# Altium PCB NEW_PCB.pcbdoc (part 2 of 2)
Units mil, origin at the board's own origin, x right, y up, seen from the top; angles counter-clockwise.
Board outline 5031.34 x 4281.32 mil, 2 copper layers (Top Layer, Bottom Layer); 79 components, 50 nets, 361 pads, 74 vias.
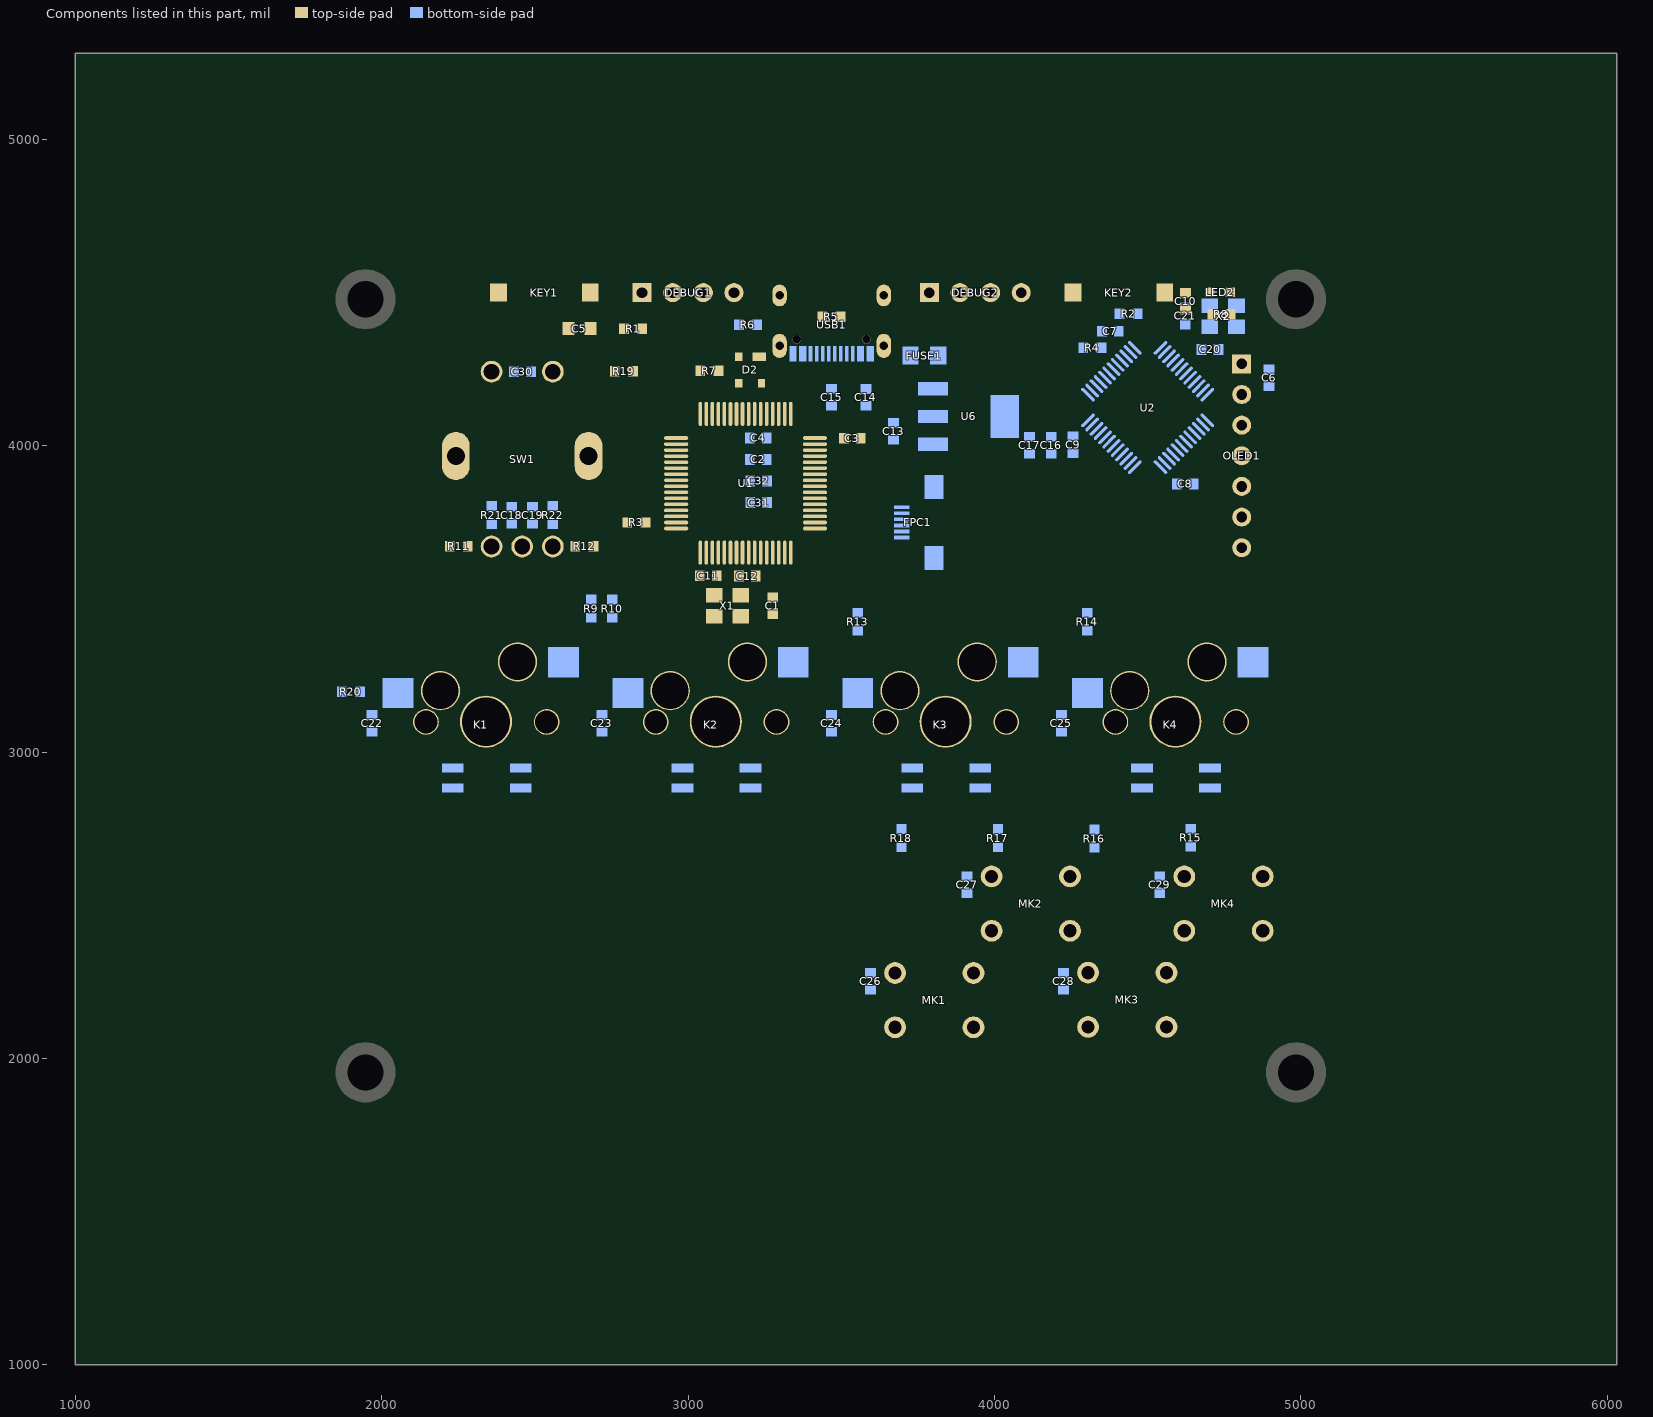
[diagram p2: the components of this part, seen from the top]

## Other copper
Top Layer:
  region net VCC: 4759.97,4207.78 4765.33,4201.8 4769.01,4196.34 4771.37,4191.23 4772.77,4186.28 4773.57,4181.3 4774.14,4176.1 4774.84,4170.49 4776.03,4164.29 4778.06,4157.31 4818.31,4156.52 4817.52,4196.76 4810.54,4198.8 4804.34,4199.99 4798.73,4200.69 4793.53,4201.26 4788.55,4202.06 4783.6,4203.46 4778.49,4205.82 4773.03,4209.5 4767.04,4214.86
  region net VCC: 3323.69,4004.9 3325.86,4006.95 3327.8,4008.55 3329.57,4009.77 3331.26,4010.7 3332.94,4011.43 3334.68,4012.04 3336.57,4012.63 3338.67,4013.28 3341.06,4014.06 3341.37,4029.64 3325.79,4029.34 3325,4026.95 3324.36,4024.85 3323.77,4022.96 3323.15,4021.22 3322.42,4019.54 3321.49,4017.85 3320.27,4016.08 3318.68,4014.14 3316.62,4011.97
  region net VCC: 3361.13,4030.38 3358.14,4030.46 3355.64,4030.7 3353.53,4031.1 3351.68,4031.63 3349.97,4032.3 3348.31,4033.1 3346.56,4034.02 3344.62,4035.05 3342.38,4036.19 3331.13,4025.41 3342.34,4014.59 3344.59,4015.72 3346.54,4016.75 3348.29,4017.66 3349.96,4018.46 3351.66,4019.13 3353.52,4019.66 3355.64,4020.06 3358.14,4020.3 3361.13,4020.38
  region net VCC: 3323.7,4004.89 3325.87,4006.94 3327.81,4008.54 3329.59,4009.76 3331.28,4010.69 3332.96,4011.42 3334.7,4012.04 3336.59,4012.63 3338.69,4013.28 3341.08,4014.07 3341.36,4029.65 3325.79,4029.32 3325,4026.93 3324.36,4024.83 3323.77,4022.95 3323.16,4021.2 3322.43,4019.52 3321.5,4017.84 3320.28,4016.06 3318.68,4014.13 3316.63,4011.96
  region net VCC: 3549.36,4055.27 3551.53,4057.33 3553.47,4058.93 3555.24,4060.14 3556.93,4061.08 3558.61,4061.81 3560.36,4062.42 3562.24,4063.01 3564.34,4063.66 3566.73,4064.44 3567.04,4080.02 3551.46,4079.72 3550.67,4077.33 3550.03,4075.23 3549.44,4073.34 3548.82,4071.6 3548.09,4069.92 3547.16,4068.23 3545.94,4066.45 3544.35,4064.52 3542.29,4062.34
  region net VCC: 2766.23,3589.28 2764.05,3587.23 2762.12,3585.63 2760.34,3584.41 2758.66,3583.48 2756.98,3582.75 2755.23,3582.14 2753.35,3581.55 2751.25,3580.91 2748.86,3580.12 2748.54,3564.54 2764.12,3564.84 2764.91,3567.23 2765.56,3569.33 2766.14,3571.21 2766.76,3572.96 2767.49,3574.64 2768.43,3576.33 2769.65,3578.1 2771.24,3580.04 2773.3,3582.21
  region net VCC: 3016.15,4377.78 3019.14,4377.7 3021.63,4377.46 3023.75,4377.06 3025.61,4376.53 3027.31,4375.86 3028.98,4375.06 3030.72,4374.14 3032.67,4373.11 3034.92,4371.98 3046.15,4382.78 3034.92,4393.58 3032.67,4392.45 3030.72,4391.42 3028.98,4390.5 3027.31,4389.7 3025.61,4389.03 3023.75,4388.49 3021.63,4388.1 3019.14,4387.86 3016.15,4387.78
  region net VCC: 3045.15,4358.78 3045.23,4361.77 3045.47,4364.27 3045.86,4366.38 3046.4,4368.24 3047.07,4369.94 3047.87,4371.61 3048.78,4373.36 3049.81,4375.3 3050.95,4377.55 3040.15,4388.78 3029.35,4377.55 3030.48,4375.3 3031.51,4373.36 3032.43,4371.61 3033.23,4369.94 3033.9,4368.24 3034.43,4366.38 3034.82,4364.27 3035.07,4361.77 3035.15,4358.78
  region net NRST1: 3163.25,3709.75 3163.33,3712.74 3163.57,3715.23 3163.96,3717.35 3164.5,3719.2 3165.17,3720.91 3165.97,3722.58 3166.89,3724.32 3167.92,3726.26 3169.05,3728.51 3158.26,3739.75 3147.45,3728.53 3148.58,3726.28 3149.61,3724.33 3150.53,3722.59 3151.33,3720.92 3152,3719.21 3152.53,3717.36 3152.92,3715.24 3153.16,3712.74 3153.25,3709.75
  region net NRST1: 2884.32,4066.24 2886.37,4064.07 2887.96,4062.14 2889.18,4060.36 2890.11,4058.68 2890.83,4057 2891.44,4055.25 2892.03,4053.37 2892.66,4051.27 2893.44,4048.88 2909.02,4048.52 2908.77,4064.1 2906.38,4064.9 2904.28,4065.55 2902.39,4066.14 2900.65,4066.76 2898.97,4067.5 2897.28,4068.43 2895.5,4069.66 2893.56,4071.25 2891.39,4073.31
  region net SPIN1: 2629.64,4247.39 2620.43,4247.9 2613.04,4249.37 2607.02,4251.66 2601.9,4254.62 2597.25,4258.09 2592.6,4261.93 2587.5,4265.98 2581.51,4270.1 2574.16,4274.13 2541.07,4242.17 2574.3,4210.35 2581.63,4214.42 2587.61,4218.56 2592.68,4222.64 2597.32,4226.5 2601.96,4230 2607.06,4232.99 2613.07,4235.31 2620.46,4236.83 2629.67,4237.39
  region net SWDIO1: 3074.52,4444.92 3074.92,4454.38 3075.96,4462.26 3077.38,4468.94 3078.95,4474.85 3080.41,4480.39 3081.53,4485.97 3082.03,4492.01 3081.69,4498.89 3080.26,4507.05 3040.33,4512.12 3036.82,4472.02 3041.84,4469.81 3046.54,4467.89 3050.86,4466.06 3054.72,4464.1 3058.05,4461.79 3060.77,4458.94 3062.8,4455.31 3064.07,4450.71 3064.52,4444.92
  region net EC11B: 3143.68,3926.79 3141.51,3924.73 3139.57,3923.14 3137.8,3921.91 3136.11,3920.98 3134.43,3920.25 3132.69,3919.64 3130.8,3919.05 3128.7,3918.41 3126.31,3917.61 3126,3902.04 3141.58,3902.34 3142.37,3904.73 3143.02,3906.84 3143.6,3908.72 3144.22,3910.46 3144.95,3912.14 3145.88,3913.83 3147.1,3915.61 3148.7,3917.54 3150.75,3919.72
  region net EC11A: 3143.23,3967.29 3141.06,3965.23 3139.12,3963.64 3137.35,3962.41 3135.66,3961.48 3133.98,3960.75 3132.24,3960.14 3130.35,3959.55 3128.25,3958.91 3125.86,3958.11 3125.55,3942.54 3141.13,3942.84 3141.92,3945.23 3142.57,3947.34 3143.15,3949.22 3143.77,3950.96 3144.5,3952.64 3145.43,3954.33 3146.65,3956.11 3148.25,3958.04 3150.3,3960.22
  region net +5V: 2323.41,3755.05 2320.42,3755.13 2317.92,3755.37 2315.8,3755.76 2313.95,3756.3 2312.25,3756.97 2310.58,3757.77 2308.83,3758.69 2306.89,3759.72 2304.64,3760.85 2293.41,3750.05 2304.64,3739.25 2306.89,3740.38 2308.83,3741.41 2310.57,3742.33 2312.24,3743.13 2313.95,3743.8 2315.8,3744.33 2317.92,3744.72 2320.42,3744.97 2323.41,3745.05
  region net +5V: 2285.97,3729.54 2288.14,3731.6 2290.08,3733.2 2291.85,3734.41 2293.54,3735.35 2295.22,3736.08 2296.97,3736.69 2298.85,3737.28 2300.95,3737.93 2303.34,3738.71 2303.65,3754.29 2288.07,3753.99 2287.28,3751.6 2286.64,3749.5 2286.05,3747.61 2285.43,3745.87 2284.7,3744.19 2283.77,3742.5 2282.55,3740.72 2280.96,3738.79 2278.9,3736.61
  region net USB_DN: 3170.39,4223.79 3170.47,4226.73 3170.72,4229.19 3171.12,4231.28 3171.67,4233.11 3172.36,4234.78 3173.19,4236.41 3174.14,4238.12 3175.22,4240 3176.41,4242.18 3166,4253.78 3154.82,4242.92 3155.9,4240.6 3156.88,4238.61 3157.75,4236.82 3158.52,4235.12 3159.17,4233.38 3159.69,4231.5 3160.07,4229.35 3160.31,4226.82 3160.39,4223.79
  region net USB_DP: 3123.45,4296.08 3120.47,4296.16 3117.98,4296.4 3115.87,4296.8 3114.02,4297.34 3112.32,4298.01 3110.66,4298.82 3108.92,4299.74 3106.99,4300.78 3104.76,4301.93 3093.45,4291.22 3104.6,4280.33 3106.86,4281.45 3108.81,4282.47 3110.57,4283.38 3112.25,4284.17 3113.96,4284.84 3115.82,4285.37 3117.94,4285.76 3120.45,4286 3123.45,4286.08
  region net USB_DP: 3104.45,4267.17 3104.53,4270.16 3104.77,4272.66 3105.16,4274.77 3105.7,4276.63 3106.37,4278.33 3107.17,4280 3108.08,4281.75 3109.11,4283.69 3110.25,4285.94 3099.45,4297.17 3088.65,4285.94 3089.78,4283.69 3090.81,4281.75 3091.73,4280 3092.53,4278.33 3093.2,4276.63 3093.73,4274.77 3094.12,4272.66 3094.36,4270.16 3094.45,4267.17
  region net VBUS: 3355.01,4229.68 3357.18,4231.73 3359.12,4233.32 3360.89,4234.55 3362.58,4235.48 3364.26,4236.21 3366.01,4236.82 3367.89,4237.41 3369.99,4238.06 3372.38,4238.84 3372.69,4254.42 3357.11,4254.12 3356.32,4251.73 3355.68,4249.63 3355.09,4247.74 3354.47,4246 3353.74,4244.32 3352.81,4242.63 3351.59,4240.85 3350,4238.92 3347.94,4236.75
  region net SW1_A: 2287.92,3666.34 2297.13,3665.81 2304.51,3664.31 2310.54,3662.01 2315.64,3659.03 2320.29,3655.55 2324.93,3651.69 2330.02,3647.63 2336.01,3643.5 2343.34,3639.45 2376.5,3671.34 2343.34,3703.23 2336.01,3699.18 2330.02,3695.05 2324.93,3690.99 2320.29,3687.14 2315.64,3683.65 2310.54,3680.68 2304.51,3678.37 2297.13,3676.87 2287.92,3676.34
  region net SW1_B: 2629.65,3676.34 2620.45,3676.87 2613.06,3678.37 2607.04,3680.68 2601.93,3683.65 2597.28,3687.14 2592.64,3690.99 2587.55,3695.05 2581.57,3699.18 2574.23,3703.23 2541.07,3671.34 2574.23,3639.45 2581.57,3643.5 2587.55,3647.63 2592.64,3651.69 2597.28,3655.55 2601.93,3659.03 2607.04,3662.01 2613.06,3664.31 2620.45,3665.81 2629.65,3666.34
  region net ADC3: 3375.8,4048.78 3378.79,4048.7 3381.28,4048.46 3383.4,4048.07 3385.26,4047.53 3386.96,4046.86 3388.63,4046.06 3390.38,4045.14 3392.32,4044.11 3394.57,4042.98 3405.8,4053.78 3394.57,4064.58 3392.32,4063.45 3390.38,4062.42 3388.63,4061.5 3386.96,4060.7 3385.26,4060.03 3383.4,4059.49 3381.28,4059.1 3378.79,4058.86 3375.8,4058.78
  region net ADC4: 3320.8,4138.78 3320.88,4141.77 3321.12,4144.27 3321.51,4146.38 3322.05,4148.24 3322.72,4149.94 3323.52,4151.61 3324.43,4153.36 3325.46,4155.3 3326.6,4157.55 3315.8,4168.78 3305,4157.55 3306.13,4155.3 3307.16,4153.36 3308.08,4151.61 3308.88,4149.94 3309.55,4148.24 3310.08,4146.38 3310.47,4144.27 3310.72,4141.77 3310.8,4138.78
  region net U1RX: 4262.97,3892.98 4265.96,3892.9 4268.46,3892.66 4270.58,3892.26 4272.43,3891.73 4274.14,3891.06 4275.81,3890.26 4277.56,3889.35 4279.5,3888.32 4281.75,3887.19 4292.97,3898.01 4281.72,3908.79 4279.47,3907.66 4277.53,3906.62 4275.79,3905.7 4274.12,3904.9 4272.42,3904.23 4270.57,3903.7 4268.45,3903.3 4265.95,3903.06 4262.97,3902.98
  region net U1TX: 4190.8,3862.78 4193.79,3862.7 4196.28,3862.46 4198.4,3862.07 4200.26,3861.53 4201.96,3860.86 4203.63,3860.06 4205.38,3859.14 4207.32,3858.11 4209.57,3856.98 4220.8,3867.78 4209.57,3878.58 4207.32,3877.45 4205.38,3876.42 4203.63,3875.5 4201.96,3874.7 4200.26,3874.03 4198.4,3873.49 4196.28,3873.1 4193.79,3872.86 4190.8,3872.78
  region net MK_4: 4690.66,2599.38 4681.46,2599.91 4674.07,2601.4 4668.05,2603.71 4662.94,2606.68 4658.29,2610.17 4653.65,2614.02 4648.57,2618.09 4642.58,2622.22 4635.24,2626.27 4602.08,2594.38 4635.24,2562.49 4642.58,2566.53 4648.56,2570.66 4653.65,2574.73 4658.29,2578.58 4662.94,2582.07 4668.05,2585.04 4674.07,2587.35 4681.46,2588.84 4690.66,2589.38
  region net MK_4: 4565.68,2640.47 4571.86,2633.55 4576.06,2627.23 4578.73,2621.32 4580.28,2615.58 4581.16,2609.81 4581.8,2603.8 4582.62,2597.32 4584.06,2590.16 4586.55,2582.12 4632.56,2582.09 4630.79,2628.07 4622.74,2630.23 4615.59,2631.41 4609.12,2632.03 4603.13,2632.52 4597.4,2633.28 4591.7,2634.74 4585.84,2637.32 4579.6,2641.45 4572.75,2647.55
  region net MK_4: 4804.93,2589.38 4814.14,2588.84 4821.52,2587.35 4827.55,2585.04 4832.65,2582.07 4837.3,2578.58 4841.94,2574.73 4847.03,2570.66 4853.02,2566.53 4860.36,2562.49 4893.51,2594.38 4860.35,2626.27 4853.01,2622.22 4847.03,2618.09 4841.94,2614.02 4837.3,2610.17 4832.65,2606.68 4827.55,2603.71 4821.52,2601.4 4814.14,2599.91 4804.93,2599.38
  region net MK_3: 4376.66,2285.38 4367.46,2285.91 4360.07,2287.4 4354.05,2289.71 4348.94,2292.68 4344.29,2296.17 4339.65,2300.02 4334.57,2304.09 4328.58,2308.22 4321.24,2312.27 4288.08,2280.38 4321.24,2248.49 4328.58,2252.53 4334.56,2256.66 4339.65,2260.73 4344.29,2264.58 4348.94,2268.07 4354.05,2271.04 4360.07,2273.35 4367.46,2274.84 4376.66,2275.38
  region net MK_3: 4490.93,2275.38 4500.14,2274.84 4507.52,2273.35 4513.55,2271.04 4518.65,2268.07 4523.3,2264.58 4527.94,2260.73 4533.03,2256.66 4539.02,2252.53 4546.36,2248.49 4579.51,2280.38 4546.35,2312.27 4539.01,2308.22 4533.03,2304.09 4527.94,2300.02 4523.3,2296.17 4518.65,2292.68 4513.55,2289.71 4507.52,2287.4 4500.14,2285.91 4490.93,2285.38
  region net MK_3: 4553.05,2348.7 4555.54,2340.61 4555.87,2333.91 4554.43,2328.23 4551.59,2323.22 4547.75,2318.52 4543.28,2313.79 4538.56,2308.65 4533.97,2302.77 4529.89,2295.78 4561.82,2262.66 4593.66,2295.87 4589.7,2303.61 4586.09,2309.95 4582.73,2315.35 4579.52,2320.24 4576.36,2325.06 4573.15,2330.26 4569.81,2336.28 4566.22,2343.55 4562.29,2352.53
  region net MK_1: 3746.66,2284.38 3737.46,2284.91 3730.07,2286.4 3724.05,2288.71 3718.94,2291.68 3714.29,2295.17 3709.65,2299.02 3704.57,2303.09 3698.58,2307.22 3691.24,2311.27 3658.08,2279.38 3691.24,2247.49 3698.58,2251.53 3704.56,2255.66 3709.65,2259.73 3714.29,2263.58 3718.94,2267.07 3724.05,2270.04 3730.07,2272.35 3737.46,2273.84 3746.66,2274.38
  region net MK_1: 3622.17,2325.97 3628.3,2319.09 3632.47,2312.81 3635.09,2306.92 3636.6,2301.21 3637.42,2295.46 3637.97,2289.45 3638.69,2282.98 3640,2275.83 3642.32,2267.78 3688.32,2266.84 3687.45,2312.84 3679.4,2315.18 3672.25,2316.49 3665.78,2317.22 3659.77,2317.78 3654.02,2318.6 3648.3,2320.11 3642.41,2322.74 3636.13,2326.91 3629.24,2333.04
  region net MK_1: 3860.93,2274.38 3870.14,2273.84 3877.53,2272.35 3883.55,2270.04 3888.66,2267.07 3893.3,2263.58 3897.94,2259.73 3903.03,2255.66 3909.02,2251.53 3916.36,2247.49 3949.51,2279.38 3916.35,2311.27 3909.01,2307.22 3903.03,2303.09 3897.94,2299.02 3893.3,2295.17 3888.65,2291.68 3883.55,2288.71 3877.52,2286.4 3870.14,2284.91 3860.93,2284.38
  region net MK_2: 4061.66,2599.38 4052.46,2599.91 4045.07,2601.4 4039.05,2603.71 4033.94,2606.68 4029.29,2610.17 4024.65,2614.02 4019.57,2618.09 4013.58,2622.22 4006.24,2626.27 3973.08,2594.38 4006.24,2562.49 4013.58,2566.53 4019.56,2570.66 4024.65,2574.73 4029.29,2578.58 4033.94,2582.07 4039.05,2585.04 4045.07,2587.35 4052.46,2588.84 4061.66,2589.38
  region net MK_2: 3919.93,2589.38 3929.14,2588.85 3936.52,2587.35 3942.55,2585.05 3947.65,2582.07 3952.3,2578.59 3956.94,2574.73 3962.03,2570.67 3968.01,2566.54 3975.35,2562.49 4008.51,2594.38 3975.35,2626.27 3968.01,2622.22 3962.03,2618.09 3956.94,2614.03 3952.3,2610.18 3947.65,2606.69 3942.55,2603.72 3936.52,2601.41 3929.14,2599.91 3919.93,2599.38
  region net MK_2: 4175.93,2589.38 4185.14,2588.84 4192.52,2587.35 4198.55,2585.04 4203.65,2582.07 4208.3,2578.58 4212.94,2574.73 4218.03,2570.66 4224.02,2566.53 4231.36,2562.49 4264.51,2594.38 4231.35,2626.27 4224.01,2622.22 4218.03,2618.09 4212.94,2614.02 4208.3,2610.17 4203.65,2606.68 4198.55,2603.71 4192.52,2601.4 4185.14,2599.91 4175.93,2599.38
  region net SPI3_MOSI: 2799.24,3901.27 2797.07,3899.22 2795.14,3897.62 2793.37,3896.4 2791.68,3895.47 2790,3894.74 2788.26,3894.13 2786.38,3893.55 2784.28,3892.91 2781.88,3892.12 2781.55,3876.55 2797.12,3876.82 2797.92,3879.21 2798.57,3881.31 2799.16,3883.2 2799.78,3884.94 2800.51,3886.62 2801.44,3888.31 2802.66,3890.09 2804.26,3892.03 2806.32,3894.21
  region net K_1: 2823.07,3881.82 2820.45,3880.08 2818.23,3878.61 2816.32,3877.39 2814.59,3876.34 2812.94,3875.44 2811.25,3874.61 2809.41,3873.81 2807.32,3873 2804.85,3872.11 2804.56,3856.53 2820.14,3856.85 2820.84,3859.18 2821.33,3861.31 2821.73,3863.27 2822.15,3865.1 2822.71,3866.84 2823.52,3868.51 2824.7,3870.16 2826.36,3871.81 2828.61,3873.5
  region net K_2: 2846,3861.88 2843.39,3860.13 2841.2,3858.66 2839.29,3857.42 2837.58,3856.37 2835.93,3855.45 2834.26,3854.62 2832.43,3853.82 2830.34,3853 2827.87,3852.12 2827.55,3836.54 2843.13,3836.83 2843.84,3839.16 2844.33,3841.3 2844.72,3843.27 2845.14,3845.11 2845.69,3846.86 2846.49,3848.54 2847.66,3850.2 2849.31,3851.86 2851.57,3853.57
  region net K_3: 2866.2,3839.31 2864.03,3837.25 2862.09,3835.65 2860.32,3834.43 2858.62,3833.49 2856.95,3832.76 2855.2,3832.14 2853.32,3831.55 2851.21,3830.9 2848.82,3830.11 2848.55,3814.53 2864.13,3814.87 2864.91,3817.26 2865.55,3819.36 2866.14,3821.24 2866.75,3822.99 2867.48,3824.67 2868.41,3826.36 2869.63,3828.13 2871.22,3830.07 2873.27,3832.24
  region net K_4: 2889.22,3819.28 2887.06,3817.23 2885.12,3815.63 2883.35,3814.41 2881.67,3813.48 2879.99,3812.75 2878.25,3812.13 2876.36,3811.55 2874.26,3810.91 2871.87,3810.12 2871.55,3794.54 2887.13,3794.83 2887.92,3797.22 2888.57,3799.32 2889.16,3801.21 2889.77,3802.95 2890.51,3804.64 2891.44,3806.33 2892.66,3808.11 2894.25,3810.05 2896.31,3812.22
  region net DP: 3492.45,4395.77 3492.37,4392.75 3492.13,4390.22 3491.75,4388.08 3491.22,4386.2 3490.57,4384.47 3489.8,4382.77 3488.92,4380.98 3487.93,4378.99 3486.86,4376.68 3497.99,4365.78 3508.45,4377.33 3507.26,4379.52 3506.19,4381.41 3505.24,4383.12 3504.41,4384.76 3503.72,4386.44 3503.18,4388.27 3502.78,4390.36 3502.53,4392.82 3502.45,4395.77
  region net NRST2: 4550.95,4456.14 4550.86,4453.15 4550.62,4450.66 4550.23,4448.54 4549.69,4446.69 4549.02,4444.99 4548.22,4443.32 4547.3,4441.57 4546.27,4439.64 4545.14,4437.39 4555.92,4426.14 4566.74,4437.35 4565.6,4439.6 4564.58,4441.55 4563.66,4443.3 4562.87,4444.97 4562.2,4446.68 4561.66,4448.53 4561.27,4450.65 4561.03,4453.15 4560.95,4456.14
  region net NRST2: 4560.93,4408.14 4561.01,4411.13 4561.25,4413.63 4561.64,4415.74 4562.18,4417.6 4562.85,4419.3 4563.65,4420.97 4564.56,4422.72 4565.59,4424.66 4566.73,4426.91 4555.93,4438.14 4545.13,4426.91 4546.26,4424.66 4547.29,4422.72 4548.21,4420.97 4549.01,4419.3 4549.68,4417.6 4550.21,4415.74 4550.6,4413.63 4550.85,4411.13 4550.93,4408.14
  region net NRST2: 4550.93,4227.52 4551.01,4223.82 4551.24,4220.73 4551.63,4218.09 4552.15,4215.77 4552.79,4213.63 4553.56,4211.51 4554.43,4209.26 4555.4,4206.76 4556.46,4203.84 4572.04,4203.54 4571.73,4219.12 4569.95,4219.67 4568.2,4220.14 4566.55,4220.6 4565.02,4221.14 4563.67,4221.81 4562.54,4222.72 4561.67,4223.92 4561.12,4225.49 4560.93,4227.52
  region net OLED_CS: 4759.97,3707.78 4765.33,3701.8 4769.01,3696.34 4771.37,3691.23 4772.77,3686.28 4773.57,3681.3 4774.14,3676.09 4774.84,3670.49 4776.03,3664.29 4778.06,3657.31 4818.31,3656.52 4817.52,3696.76 4810.54,3698.8 4804.34,3699.99 4798.73,3700.68 4793.53,3701.26 4788.55,3702.06 4783.6,3703.46 4778.49,3705.82 4773.03,3709.5 4767.04,3714.86
  region net OLED_CS: 4738.35,4025.38 4738.43,4028.37 4738.67,4030.87 4739.06,4032.98 4739.6,4034.84 4740.27,4036.54 4741.07,4038.21 4741.98,4039.96 4743.01,4041.9 4744.15,4044.15 4733.35,4055.38 4722.55,4044.15 4723.68,4041.9 4724.71,4039.96 4725.63,4038.21 4726.43,4036.54 4727.1,4034.84 4727.63,4032.98 4728.02,4030.87 4728.27,4028.37 4728.35,4025.38
  region net ADC1: 3482.44,3744.92 3485.43,3744.84 3487.93,3744.61 3490.04,3744.22 3491.9,3743.69 3493.6,3743.02 3495.28,3742.22 3497.03,3741.31 3498.97,3740.29 3501.22,3739.16 3512.43,3749.98 3501.17,3760.76 3498.93,3759.62 3496.99,3758.59 3495.24,3757.66 3493.57,3756.86 3491.87,3756.19 3490.02,3755.65 3487.9,3755.25 3485.41,3755.01 3482.42,3754.92
  region net ADC2: 3482.43,3784.19 3485.42,3784.11 3487.91,3783.87 3490.03,3783.47 3491.89,3782.94 3493.59,3782.27 3495.26,3781.47 3497.01,3780.55 3498.95,3779.52 3501.2,3778.39 3512.43,3789.19 3501.2,3799.99 3498.95,3798.86 3497.01,3797.83 3495.26,3796.91 3493.59,3796.11 3491.89,3795.44 3490.03,3794.91 3487.91,3794.51 3485.42,3794.27 3482.43,3794.19
  region net SWCLK1: 3018.8,4185.78 3018.88,4188.77 3019.12,4191.27 3019.51,4193.38 3020.05,4195.24 3020.72,4196.94 3021.52,4198.61 3022.43,4200.36 3023.46,4202.3 3024.6,4204.55 3013.8,4215.78 3003,4204.55 3004.13,4202.3 3005.16,4200.36 3006.08,4198.61 3006.88,4196.94 3007.55,4195.24 3008.08,4193.38 3008.47,4191.27 3008.72,4188.77 3008.8,4185.78
  region net SWDIO2: 4034.94,4459.74 4029.59,4465.73 4025.91,4471.19 4023.55,4476.3 4022.15,4481.25 4021.34,4486.23 4020.77,4491.44 4020.07,4497.04 4018.89,4503.24 4016.85,4510.22 3976.61,4511.01 3977.39,4470.77 3984.38,4468.73 3990.58,4467.54 3996.18,4466.85 4001.38,4466.27 4006.36,4465.47 4011.32,4464.07 4016.43,4461.71 4021.88,4458.03 4027.87,4452.67
  region net SWDIO2: 4358.34,4122.21 4359.69,4120.67 4360.61,4119.21 4361.17,4117.8 4361.4,4116.41 4361.36,4115.01 4361.1,4113.59 4360.67,4112.1 4360.12,4110.53 4359.51,4108.85 4371.42,4098.81 4380.99,4111.11 4379.36,4113.67 4377.89,4115.82 4376.51,4117.68 4375.13,4119.37 4373.67,4120.99 4372.05,4122.68 4370.19,4124.54 4368,4126.7 4365.41,4129.28
Bottom Layer:
  region net NRST1: 3153.25,3757.75 3153.17,3754.76 3152.93,3752.26 3152.53,3750.14 3152,3748.29 3151.33,3746.59 3150.53,3744.91 3149.61,3743.17 3148.59,3741.22 3147.45,3738.97 3158.26,3727.75 3169.05,3738.99 3167.92,3741.24 3166.89,3743.18 3165.97,3744.92 3165.17,3746.59 3164.5,3748.3 3163.97,3750.15 3163.57,3752.26 3163.33,3754.76 3163.25,3757.75
  region net NRST1: 2928.79,4057.78 2925.8,4057.86 2923.3,4058.1 2921.19,4058.49 2919.33,4059.03 2917.63,4059.7 2915.96,4060.5 2914.21,4061.42 2912.27,4062.45 2910.02,4063.58 2898.79,4052.77 2910.03,4041.98 2912.28,4043.11 2914.22,4044.14 2915.96,4045.06 2917.63,4045.86 2919.34,4046.53 2921.19,4047.06 2923.31,4047.46 2925.8,4047.7 2928.79,4047.78
  region net VCC: 3113.74,4449.31 3120.04,4454.97 3125.75,4458.95 3131.06,4461.62 3136.16,4463.41 3141.24,4464.69 3146.47,4465.89 3152.05,4467.38 3158.17,4469.58 3165,4472.89 3159.02,4512.69 3119.48,4505.16 3118.66,4498.31 3118.44,4492.23 3118.49,4486.74 3118.5,4481.67 3118.15,4476.85 3117.11,4472.08 3115.06,4467.2 3111.69,4462.02 3106.67,4456.38
  region net VCC: 4134.94,4459.74 4129.59,4465.73 4125.91,4471.19 4123.55,4476.3 4122.15,4481.25 4121.34,4486.23 4120.77,4491.44 4120.07,4497.04 4118.89,4503.24 4116.85,4510.22 4076.61,4511.01 4077.39,4470.77 4084.38,4468.73 4090.58,4467.54 4096.18,4466.85 4101.38,4466.27 4106.36,4465.47 4111.32,4464.07 4116.43,4461.71 4121.88,4458.03 4127.87,4452.67
  region net VCC: 4854.72,4127.18 4849.36,4133.16 4845.69,4138.62 4843.33,4143.73 4841.93,4148.68 4841.12,4153.66 4840.55,4158.86 4839.85,4164.47 4838.67,4170.67 4836.63,4177.65 4796.39,4178.44 4797.17,4138.2 4804.16,4136.16 4810.36,4134.97 4815.96,4134.27 4821.16,4133.7 4826.14,4132.9 4831.1,4131.5 4836.21,4129.14 4841.66,4125.46 4847.65,4120.1
  region net VCC: 4759.97,4207.78 4765.33,4201.8 4769.01,4196.34 4771.37,4191.23 4772.77,4186.28 4773.57,4181.3 4774.14,4176.1 4774.84,4170.49 4776.03,4164.29 4778.06,4157.31 4818.31,4156.52 4817.52,4196.76 4810.54,4198.8 4804.34,4199.99 4798.73,4200.69 4793.53,4201.26 4788.55,4202.06 4783.6,4203.46 4778.49,4205.82 4773.03,4209.5 4767.04,4214.86
  region net VCC: 4860.24,4199.18 4850.87,4199.36 4843.03,4199.81 4836.35,4200.37 4830.43,4200.88 4824.89,4201.19 4819.32,4201.13 4813.35,4200.56 4806.57,4199.31 4798.61,4197.22 4795.87,4157.07 4836.1,4155.89 4838.03,4161.46 4839.51,4166.87 4840.8,4171.99 4842.19,4176.69 4843.94,4180.83 4846.35,4184.28 4849.69,4186.91 4854.23,4188.59 4860.24,4189.18
  region net VCC: 3313.1,4020.5 3316.09,4020.4 3318.59,4020.15 3320.71,4019.75 3322.56,4019.2 3324.26,4018.53 3325.93,4017.72 3327.67,4016.8 3329.61,4015.76 3331.86,4014.62 3343.13,4025.38 3331.93,4036.22 3329.68,4035.09 3327.74,4034.07 3325.99,4033.16 3324.32,4032.37 3322.61,4031.7 3320.75,4031.18 3318.64,4030.8 3316.14,4030.57 3313.15,4030.5
  region net VCC: 3586.82,4080.69 3583.83,4080.78 3581.33,4081.03 3579.21,4081.43 3577.36,4081.98 3575.66,4082.65 3573.99,4083.46 3572.25,4084.38 3570.31,4085.42 3568.07,4086.56 3556.8,4075.8 3567.99,4064.96 3570.24,4066.09 3572.19,4067.11 3573.94,4068.02 3575.61,4068.81 3577.32,4069.47 3579.17,4070 3581.29,4070.39 3583.79,4070.62 3586.78,4070.69
  region net VCC: 2757.79,3544.78 2757.87,3547.77 2758.11,3550.27 2758.51,3552.39 2759.04,3554.24 2759.71,3555.94 2760.51,3557.61 2761.43,3559.36 2762.46,3561.3 2763.59,3563.55 2752.78,3574.78 2741.99,3563.55 2743.12,3561.3 2744.15,3559.36 2745.07,3557.61 2745.87,3555.94 2746.54,3554.24 2747.08,3552.38 2747.47,3550.26 2747.71,3547.77 2747.79,3544.78
  region net VCC: 3053.58,4403.29 3051.41,4401.23 3049.47,4399.64 3047.7,4398.41 3046.01,4397.48 3044.33,4396.75 3042.59,4396.14 3040.7,4395.55 3038.6,4394.9 3036.21,4394.11 3035.9,4378.54 3051.48,4378.84 3052.27,4381.23 3052.92,4383.34 3053.5,4385.22 3054.12,4386.96 3054.85,4388.64 3055.78,4390.33 3057,4392.11 3058.6,4394.04 3060.65,4396.22
  region net EC11A: 3114.78,3926.66 3117.44,3928.39 3119.72,3929.78 3121.72,3930.88 3123.55,3931.77 3125.3,3932.52 3127.09,3933.2 3129.02,3933.86 3131.19,3934.58 3133.7,3935.43 3134.05,3951.01 3118.47,3950.75 3117.75,3948.49 3117.17,3946.46 3116.65,3944.61 3116.09,3942.9 3115.38,3941.29 3114.44,3939.73 3113.17,3938.19 3111.46,3936.61 3109.22,3934.97
  region net EC11B: 3106.24,3901.31 3109.23,3901.23 3111.73,3900.98 3113.84,3900.59 3115.7,3900.05 3117.4,3899.38 3119.07,3898.58 3120.81,3897.66 3122.75,3896.62 3125,3895.49 3136.25,3906.27 3125.03,3917.09 3122.78,3915.96 3120.84,3914.93 3119.09,3914.01 3117.42,3913.22 3115.71,3912.55 3113.86,3912.02 3111.74,3911.63 3109.24,3911.39 3106.25,3911.31
  region net +5V: 2294.45,3774.05 2294.36,3771.07 2294.12,3768.57 2293.73,3766.46 2293.19,3764.61 2292.52,3762.91 2291.72,3761.24 2290.8,3759.5 2289.76,3757.56 2288.62,3755.32 2299.39,3744.05 2310.22,3755.24 2309.1,3757.5 2308.07,3759.45 2307.16,3761.2 2306.36,3762.87 2305.7,3764.58 2305.16,3766.43 2304.77,3768.56 2304.53,3771.06 2304.45,3774.05
  region net +5V: 2285.97,3729.54 2288.14,3731.6 2290.08,3733.2 2291.86,3734.41 2293.54,3735.35 2295.22,3736.08 2296.97,3736.69 2298.85,3737.28 2300.95,3737.93 2303.34,3738.72 2303.65,3754.29 2288.07,3753.99 2287.28,3751.6 2286.64,3749.49 2286.05,3747.61 2285.43,3745.87 2284.7,3744.19 2283.77,3742.5 2282.55,3740.72 2280.96,3738.79 2278.9,3736.61
  region net SW1_B: 2553.79,3742.21 2553.26,3733 2551.76,3725.61 2549.45,3719.59 2546.48,3714.48 2542.99,3709.84 2539.14,3705.2 2535.08,3700.11 2530.95,3694.12 2526.9,3686.79 2558.79,3653.62 2590.68,3686.78 2586.63,3694.12 2582.5,3700.11 2578.43,3705.19 2574.58,3709.83 2571.1,3714.48 2568.13,3719.59 2565.82,3725.61 2564.32,3733 2563.79,3742.21
  region net SW1_A: 2353.79,3742.21 2353.26,3733 2351.76,3725.61 2349.45,3719.59 2346.48,3714.48 2342.99,3709.84 2339.14,3705.2 2335.08,3700.11 2330.95,3694.12 2326.9,3686.79 2358.79,3653.62 2390.68,3686.78 2386.63,3694.12 2382.5,3700.11 2378.43,3705.19 2374.58,3709.83 2371.1,3714.48 2368.13,3719.59 2365.82,3725.61 2364.32,3733 2363.79,3742.21
  region net VBUS: 3375.25,4264.36 3375.18,4263.67 3375,4263.08 3374.7,4262.58 3374.32,4262.19 3373.87,4261.9 3373.36,4261.71 3372.8,4261.63 3372.22,4261.64 3371.63,4261.75 3362.55,4249.09 3375.55,4240.51 3378.15,4242.57 3380.24,4244.59 3381.89,4246.64 3383.13,4248.82 3384.03,4251.2 3384.64,4253.86 3385.01,4256.89 3385.2,4260.36 3385.25,4264.36
  region net VBUS: 3392.41,4246.25 3389.74,4248.97 3387.5,4251.29 3385.55,4253.27 3383.76,4254.98 3382,4256.47 3380.15,4257.8 3378.07,4259.02 3375.64,4260.2 3372.72,4261.39 3362.47,4249.66 3374.6,4239.88 3375.85,4240.58 3377.06,4241.15 3378.24,4241.56 3379.4,4241.78 3380.55,4241.8 3381.71,4241.57 3382.88,4241.08 3384.09,4240.3 3385.33,4239.19
  region net VBUS: 3363.45,4274.18 3363.36,4271.19 3363.12,4268.69 3362.73,4266.58 3362.2,4264.72 3361.53,4263.02 3360.73,4261.35 3359.81,4259.6 3358.78,4257.66 3357.65,4255.41 3368.45,4244.18 3379.25,4255.41 3378.11,4257.66 3377.08,4259.6 3376.17,4261.35 3375.37,4263.02 3374.7,4264.72 3374.16,4266.58 3373.77,4268.69 3373.53,4271.19 3373.45,4274.18
  region net VBUS: 3388.93,4236.71 3386.88,4238.89 3385.29,4240.83 3384.07,4242.6 3383.14,4244.29 3382.41,4245.97 3381.8,4247.72 3381.22,4249.6 3380.57,4251.71 3379.79,4254.1 3364.21,4254.43 3364.49,4238.85 3366.88,4238.06 3368.98,4237.41 3370.86,4236.82 3372.61,4236.2 3374.29,4235.47 3375.97,4234.53 3377.75,4233.31 3379.68,4231.71 3381.85,4229.65
  region net USB_DN: 3160.8,4271.78 3160.72,4268.79 3160.47,4266.29 3160.08,4264.18 3159.55,4262.32 3158.88,4260.62 3158.08,4258.95 3157.16,4257.2 3156.13,4255.26 3155,4253.01 3165.8,4241.78 3176.6,4253.01 3175.46,4255.26 3174.43,4257.2 3173.52,4258.95 3172.72,4260.62 3172.05,4262.32 3171.51,4264.18 3171.12,4266.29 3170.88,4268.79 3170.8,4271.78
  region net MK_1: 3691.8,2343.35 3691.27,2336.48 3689.77,2331.04 3687.36,2326.76 3684.16,2323.39 3680.24,2320.65 3675.7,2318.28 3670.63,2316.01 3665.12,2313.58 3659.26,2310.72 3665.3,2265.11 3710.64,2272.92 3711.84,2282.29 3711.83,2290.15 3710.89,2297 3709.3,2303.3 3707.36,2309.53 3705.36,2316.17 3703.57,2323.7 3702.29,2332.6 3701.8,2343.35
  region net MK_1: 3604.93,2274.33 3614.14,2273.8 3621.53,2272.3 3627.56,2269.99 3632.67,2267.02 3637.32,2263.54 3641.97,2259.69 3647.06,2255.63 3653.05,2251.51 3660.4,2247.47 3693.51,2279.41 3660.31,2311.25 3652.98,2307.19 3647,2303.05 3641.92,2298.98 3637.28,2295.13 3632.64,2291.64 3627.53,2288.67 3621.52,2286.36 3614.13,2284.86 3604.93,2284.33
  region net K_3: 2839.33,3798.29 2841.5,3800.35 2843.44,3801.94 2845.21,3803.16 2846.9,3804.09 2848.58,3804.82 2850.32,3805.43 2852.21,3806.01 2854.31,3806.65 2856.7,3807.43 2857.04,3823.01 2841.46,3822.74 2840.66,3820.35 2840.01,3818.25 2839.42,3816.37 2838.81,3814.62 2838.07,3812.94 2837.14,3811.25 2835.92,3809.48 2834.32,3807.54 2832.26,3805.36
  region net ADC3: 3404.75,4029.78 3404.83,4032.76 3405.07,4035.26 3405.47,4037.37 3406,4039.22 3406.68,4040.92 3407.48,4042.59 3408.4,4044.33 3409.43,4046.26 3410.58,4048.51 3399.82,4059.78 3388.98,4048.59 3390.1,4046.34 3391.12,4044.39 3392.04,4042.64 3392.83,4040.96 3393.5,4039.25 3394.03,4037.4 3394.43,4035.28 3394.67,4032.78 3394.75,4029.78
  region net SPIN1: 2487.92,4237.21 2497.13,4236.68 2504.51,4235.18 2510.54,4232.87 2515.64,4229.9 2520.29,4226.41 2524.93,4222.56 2530.02,4218.5 2536.01,4214.37 2543.34,4210.32 2576.5,4242.21 2543.34,4274.1 2536,4270.05 2530.02,4265.92 2524.93,4261.85 2520.29,4258 2515.64,4254.52 2510.53,4251.54 2504.51,4249.24 2497.13,4247.74 2487.92,4247.21
  region net K_4: 2862.36,3778.27 2864.53,3780.32 2866.47,3781.92 2868.25,3783.14 2869.94,3784.07 2871.62,3784.8 2873.37,3785.42 2875.26,3786.01 2877.36,3786.66 2879.75,3787.45 2880.03,3803.03 2864.46,3802.7 2863.67,3800.31 2863.03,3798.21 2862.44,3796.33 2861.83,3794.59 2861.1,3792.91 2860.17,3791.22 2858.95,3789.45 2857.35,3787.52 2855.3,3785.35
  region net MK_2: 4006.8,2658.35 4006.27,2651.48 4004.77,2646.04 4002.36,2641.76 3999.16,2638.39 3995.24,2635.65 3990.7,2633.28 3985.63,2631.01 3980.12,2628.58 3974.26,2625.72 3980.3,2580.11 4025.64,2587.92 4026.84,2597.29 4026.83,2605.15 4025.89,2612 4024.3,2618.3 4022.36,2624.53 4020.36,2631.17 4018.57,2638.7 4017.29,2647.6 4016.8,2658.35
  region net MK_2: 3919.93,2589.33 3929.14,2588.8 3936.53,2587.3 3942.56,2584.99 3947.67,2582.02 3952.32,2578.54 3956.97,2574.69 3962.06,2570.63 3968.05,2566.51 3975.4,2562.47 4008.51,2594.41 3975.31,2626.25 3967.98,2622.19 3962,2618.05 3956.92,2613.98 3952.28,2610.13 3947.64,2606.64 3942.53,2603.67 3936.52,2601.36 3929.13,2599.86 3919.93,2599.33
  region net MK_4: 4635.8,2658.35 4635.27,2651.48 4633.77,2646.04 4631.36,2641.76 4628.16,2638.39 4624.24,2635.65 4619.7,2633.28 4614.63,2631.01 4609.12,2628.58 4603.27,2625.72 4609.3,2580.11 4654.64,2587.92 4655.84,2597.29 4655.83,2605.15 4654.89,2612 4653.3,2618.3 4651.36,2624.53 4649.36,2631.17 4647.57,2638.7 4646.29,2647.6 4645.8,2658.35
  region net MK_4: 4548.94,2590.33 4558.07,2589.8 4565.38,2588.3 4571.33,2585.98 4576.37,2582.98 4580.94,2579.45 4585.5,2575.54 4590.48,2571.38 4596.33,2567.12 4603.5,2562.92 4637.51,2593.91 4605.21,2626.67 4597.72,2622.79 4591.6,2618.79 4586.41,2614.82 4581.68,2611.04 4576.96,2607.6 4571.78,2604.65 4565.69,2602.35 4558.23,2600.86 4548.94,2600.33
  region net MK_3: 4321.8,2344.35 4321.27,2337.48 4319.77,2332.04 4317.36,2327.76 4314.16,2324.39 4310.24,2321.65 4305.7,2319.28 4300.63,2317.01 4295.12,2314.58 4289.27,2311.72 4295.3,2266.11 4340.64,2273.92 4341.84,2283.29 4341.83,2291.15 4340.89,2298 4339.3,2304.3 4337.36,2310.53 4335.36,2317.17 4333.57,2324.7 4332.29,2333.6 4331.8,2344.35
  region net MK_3: 4234.95,2274.33 4244.24,2273.8 4251.71,2272.31 4257.81,2270.01 4262.99,2267.07 4267.72,2263.63 4272.46,2259.86 4277.66,2255.89 4283.79,2251.91 4291.3,2248.05 4323.51,2280.91 4289.41,2311.8 4282.26,2307.57 4276.42,2303.31 4271.45,2299.14 4266.91,2295.22 4262.35,2291.68 4257.31,2288.68 4251.37,2286.36 4244.06,2284.86 4234.95,2284.33
  region net K_1: 2796.28,3840.8 2797.96,3843.04 2799.59,3844.71 2801.21,3845.91 2802.85,3846.75 2804.56,3847.34 2806.36,3847.8 2808.29,3848.22 2810.39,3848.73 2812.7,3849.43 2813.05,3865.01 2797.47,3864.75 2796.59,3862.27 2795.79,3860.16 2795.02,3858.3 2794.23,3856.58 2793.36,3854.9 2792.35,3853.15 2791.15,3851.22 2789.71,3848.99 2787.96,3846.35
  region net K_2: 2818.35,3820.27 2820.53,3822.33 2822.47,3823.92 2824.25,3825.14 2825.94,3826.07 2827.62,3826.8 2829.37,3827.42 2831.25,3828.01 2833.35,3828.66 2835.75,3829.45 2836.03,3845.03 2820.46,3844.7 2819.67,3842.32 2819.03,3840.22 2818.44,3838.33 2817.83,3836.59 2817.1,3834.91 2816.17,3833.22 2814.95,3831.45 2813.35,3829.52 2811.29,3827.36
  region net U1TX: 4228.21,3888.31 4226.03,3886.25 4224.1,3884.66 4222.32,3883.43 4220.63,3882.5 4218.95,3881.76 4217.2,3881.14 4215.32,3880.55 4213.22,3879.9 4210.83,3879.1 4210.57,3863.53 4226.14,3863.88 4226.93,3866.27 4227.56,3868.37 4228.15,3870.25 4228.76,3872 4229.48,3873.67 4230.41,3875.36 4231.63,3877.14 4233.23,3879.07 4235.28,3881.24
  region net U1RX: 4300.4,3918.51 4298.23,3916.45 4296.29,3914.86 4294.52,3913.64 4292.83,3912.7 4291.15,3911.97 4289.4,3911.36 4287.52,3910.77 4285.42,3910.12 4283.03,3909.33 4282.73,3893.76 4298.3,3894.07 4299.09,3896.46 4299.74,3898.56 4300.32,3900.44 4300.94,3902.19 4301.67,3903.87 4302.6,3905.55 4303.82,3907.33 4305.41,3909.27 4307.47,3911.44
  region net SWDIO2: 4365.41,4080.77 4368.07,4083.37 4370.35,4085.53 4372.33,4087.38 4374.06,4089.05 4375.62,4090.65 4377.06,4092.34 4378.47,4094.23 4379.89,4096.46 4381.4,4099.16 4371.02,4110.78 4359.81,4099.95 4360.44,4098.46 4360.94,4097.05 4361.29,4095.71 4361.45,4094.41 4361.4,4093.14 4361.09,4091.87 4360.5,4090.57 4359.59,4089.24 4358.34,4087.84
  region net NRST2: 4532,4425.78 4535.13,4425.7 4537.74,4425.48 4539.96,4425.12 4541.91,4424.64 4543.71,4424.05 4545.49,4423.36 4547.38,4422.58 4549.49,4421.73 4551.95,4420.82 4561.89,4432.82 4549.51,4442.28 4547.49,4440.97 4545.74,4439.79 4544.14,4438.75 4542.59,4437.86 4540.99,4437.13 4539.24,4436.55 4537.23,4436.12 4534.85,4435.87 4532,4435.78
  region net NRST2: 4590.7,4213.87 4587.96,4213.45 4585.64,4213.36 4583.65,4213.56 4581.89,4214.01 4580.25,4214.67 4578.65,4215.49 4576.98,4216.44 4575.14,4217.49 4573.03,4218.58 4561.8,4207.78 4573.02,4196.98 4575.41,4198.15 4577.46,4199.16 4579.3,4200.04 4581.04,4200.81 4582.82,4201.51 4584.75,4202.16 4586.95,4202.78 4589.54,4203.41 4592.65,4204.06
  region net DP: 3502.85,4347.78 3502.93,4350.77 3503.17,4353.27 3503.56,4355.4 3504.09,4357.25 3504.76,4358.96 3505.56,4360.63 3506.47,4362.38 3507.5,4364.33 3508.62,4366.59 3497.79,4377.78 3487.02,4366.51 3488.16,4364.27 3489.2,4362.33 3490.12,4360.59 3490.92,4358.93 3491.59,4357.22 3492.13,4355.37 3492.52,4353.26 3492.76,4350.77 3492.85,4347.78
  region net OLED_DC: 4784.37,3819.79 4788.19,3815.16 4790.26,3810.8 4790.85,3806.61 4790.23,3802.49 4788.69,3798.35 4786.49,3794.07 4783.92,3789.56 4781.25,3784.73 4778.76,3779.46 4808.19,3752 4834.48,3782.48 4830.25,3789.56 4826.25,3795.17 4822.32,3799.72 4818.3,3803.6 4814.04,3807.2 4809.38,3810.93 4804.17,3815.19 4798.24,3820.37 4791.44,3826.86
  region net OLED_RES: 4748.15,3883.81 4754.63,3877 4759.78,3871.05 4764,3865.81 4767.69,3861.11 4771.25,3856.8 4775.08,3852.73 4779.58,3848.75 4785.15,3844.7 4792.2,3840.43 4822.82,3866.56 4795.52,3896.13 4790.25,3893.68 4785.41,3891.06 4780.91,3888.54 4776.63,3886.4 4772.49,3884.91 4768.38,3884.34 4764.19,3884.96 4759.84,3887.05 4755.22,3890.88
  region net OLED_MOSI: 4745.35,3962.48 4753.37,3962.03 4759.83,3960.78 4765.11,3958.83 4769.6,3956.32 4773.69,3953.37 4777.78,3950.09 4782.23,3946.62 4787.46,3943.08 4793.83,3939.58 4822.85,3967.48 4793.83,3995.38 4787.46,3991.88 4782.23,3988.34 4777.78,3984.87 4773.69,3981.59 4769.6,3978.64 4765.11,3976.13 4759.83,3974.18 4753.37,3972.93 4745.35,3972.48
  region net OLED_SCK: 4762.52,4023.04 4770.57,4026.16 4777.36,4028.41 4783.22,4029.99 4788.49,4031.14 4793.49,4032.08 4798.57,4033.03 4804.05,4034.22 4810.25,4035.86 4817.52,4038.2 4818.31,4078.44 4778.06,4077.65 4776.27,4071 4775.37,4064.74 4774.94,4058.87 4774.56,4053.39 4773.8,4048.33 4772.26,4043.68 4769.51,4039.45 4765.13,4035.65 4758.69,4032.28
  region net OLED_CS: 4708.42,4044.96 4711.52,4044.33 4714.11,4043.77 4716.32,4043.24 4718.27,4042.7 4720.07,4042.11 4721.84,4041.45 4723.69,4040.66 4725.74,4039.72 4728.12,4038.58 4739.35,4049.38 4728.12,4060.18 4725.98,4059.05 4724.14,4057.94 4722.46,4056.89 4720.86,4055.95 4719.24,4055.18 4717.48,4054.62 4715.48,4054.34 4713.15,4054.37 4710.37,4054.77
  region net ADC2: 3526.93,3775.75 3524.88,3777.92 3523.28,3779.86 3522.06,3781.64 3521.13,3783.32 3520.4,3785 3519.78,3786.75 3519.2,3788.63 3518.55,3790.73 3517.76,3793.12 3502.19,3793.43 3502.49,3777.86 3504.88,3777.07 3506.98,3776.42 3508.86,3775.83 3510.61,3775.22 3512.29,3774.49 3513.98,3773.55 3515.75,3772.33 3517.69,3770.74 3519.86,3768.68
  region net ADC4: 3340.7,4166.98 3337.6,4167.61 3335.01,4168.19 3332.8,4168.76 3330.86,4169.33 3329.07,4169.95 3327.31,4170.65 3325.46,4171.47 3323.41,4172.43 3321.03,4173.58 3309.8,4162.78 3321.03,4151.98 3323.15,4153.1 3325,4154.19 3326.67,4155.21 3328.27,4156.11 3329.9,4156.84 3331.66,4157.36 3333.66,4157.62 3335.99,4157.57 3338.75,4157.17
  region net ADC1: 3526.93,3736.53 3524.87,3738.7 3523.28,3740.64 3522.06,3742.41 3521.13,3744.1 3520.4,3745.78 3519.78,3747.53 3519.2,3749.41 3518.55,3751.51 3517.76,3753.9 3502.19,3754.22 3502.48,3738.64 3504.88,3737.85 3506.98,3737.2 3508.86,3736.61 3510.61,3736 3512.28,3735.26 3513.97,3734.33 3515.75,3733.11 3517.68,3731.52 3519.86,3729.46
  region net SPI3_MOSI: 2773.68,3860.45 2775.35,3862.68 2776.95,3864.38 2778.53,3865.62 2780.12,3866.52 2781.77,3867.18 2783.52,3867.7 2785.4,3868.18 2787.46,3868.73 2789.74,3869.45 2790.04,3885.03 2774.46,3884.71 2773.59,3882.21 2772.84,3880.07 2772.14,3878.17 2771.42,3876.41 2770.62,3874.68 2769.68,3872.89 2768.53,3870.92 2767.12,3868.66 2765.38,3866.02
  region net SWCLK1: 2955.06,4438.05 2955.5,4446.07 2956.76,4452.53 2958.71,4457.81 2961.22,4462.31 2964.17,4466.4 2967.45,4470.48 2970.92,4474.94 2974.46,4480.16 2977.96,4486.54 2950.06,4515.55 2922.16,4486.54 2925.65,4480.16 2929.2,4474.94 2932.67,4470.48 2935.94,4466.4 2938.9,4462.31 2941.41,4457.81 2943.35,4452.53 2944.61,4446.07 2945.06,4438.05
  region net SWCLK1: 2993.29,4223.22 2995.35,4221.04 2996.94,4219.11 2998.16,4217.33 2999.09,4215.64 2999.82,4213.96 3000.44,4212.22 3001.03,4210.34 3001.67,4208.23 3002.46,4205.84 3018.04,4205.54 3017.74,4221.11 3015.34,4221.9 3013.24,4222.55 3011.36,4223.14 3009.61,4223.75 3007.93,4224.48 3006.24,4225.41 3004.47,4226.64 3002.53,4228.23 3000.36,4230.29
  region net SWCLK2: 3934.95,4459.75 3929.59,4465.74 3925.91,4471.2 3923.55,4476.31 3922.15,4481.26 3921.34,4486.24 3920.77,4491.44 3920.07,4497.05 3918.89,4503.25 3916.85,4510.23 3876.6,4511.01 3877.4,4470.77 3884.38,4468.73 3890.58,4467.54 3896.19,4466.85 3901.39,4466.28 3906.37,4465.47 3911.32,4464.07 3916.43,4461.71 3921.89,4458.04 3927.88,4452.68

## Silkscreen, mask and mechanical layers (free items; w line width, h text height)
Top Overlay:
  lines w9 net S$81355: 3737.75,4234.78 4136.75,4234.78 4136.75,4406.28 3750.05,4406.28 3737.75,4406.28 3737.75,4234.78
  text "GND" at 3834.3,4265.78 h45 r90
  text "CLK" at 3934.3,4265.78 h45 r90
  text "DIO" at 4034.3,4265.78 h45 r90
  text "3V3" at 4134.3,4265.78 h45 r90
Bottom Overlay:
  text "JLCJLCJLCJLC" at 4687.8,3614.28 h45

## Text inside footprints (layer, text, board x,y; h text height)
K1: Bottom Overlay "DOUT" at 2493.78,2970.59 h23.62 r180; Bottom Overlay "DIN" at 2148.78,2905.59 h23.62 r180; Bottom Overlay "VCC" at 2493.78,2905.59 h23.62 r180; Bottom Overlay "GND" at 2133.78,2970.59 h23.62 r180
K2: Bottom Overlay "DOUT" at 3243.8,2970.59 h23.62 r180; Bottom Overlay "DIN" at 2898.8,2905.59 h23.62 r180; Bottom Overlay "VCC" at 3243.8,2905.59 h23.62 r180; Bottom Overlay "GND" at 2883.8,2970.59 h23.62 r180
K3: Bottom Overlay "DOUT" at 3993.81,2970.59 h23.62 r180; Bottom Overlay "DIN" at 3648.81,2905.59 h23.62 r180; Bottom Overlay "VCC" at 3993.81,2905.59 h23.62 r180; Bottom Overlay "GND" at 3633.81,2970.59 h23.62 r180
K4: Bottom Overlay "DOUT" at 4743.83,2970.59 h23.62 r180; Bottom Overlay "DIN" at 4398.83,2905.59 h23.62 r180; Bottom Overlay "VCC" at 4743.83,2905.59 h23.62 r180; Bottom Overlay "GND" at 4383.83,2970.59 h23.62 r180